# Altium PCB MacroPadPCB.PcbDoc
Units mm, origin at the board's own origin, x right, y up, seen from the top; angles counter-clockwise.
Board outline 95 x 120 mm, 2 copper layers (Top Layer, Bottom Layer); 33 components, 24 nets, 107 pads, 0 vias.
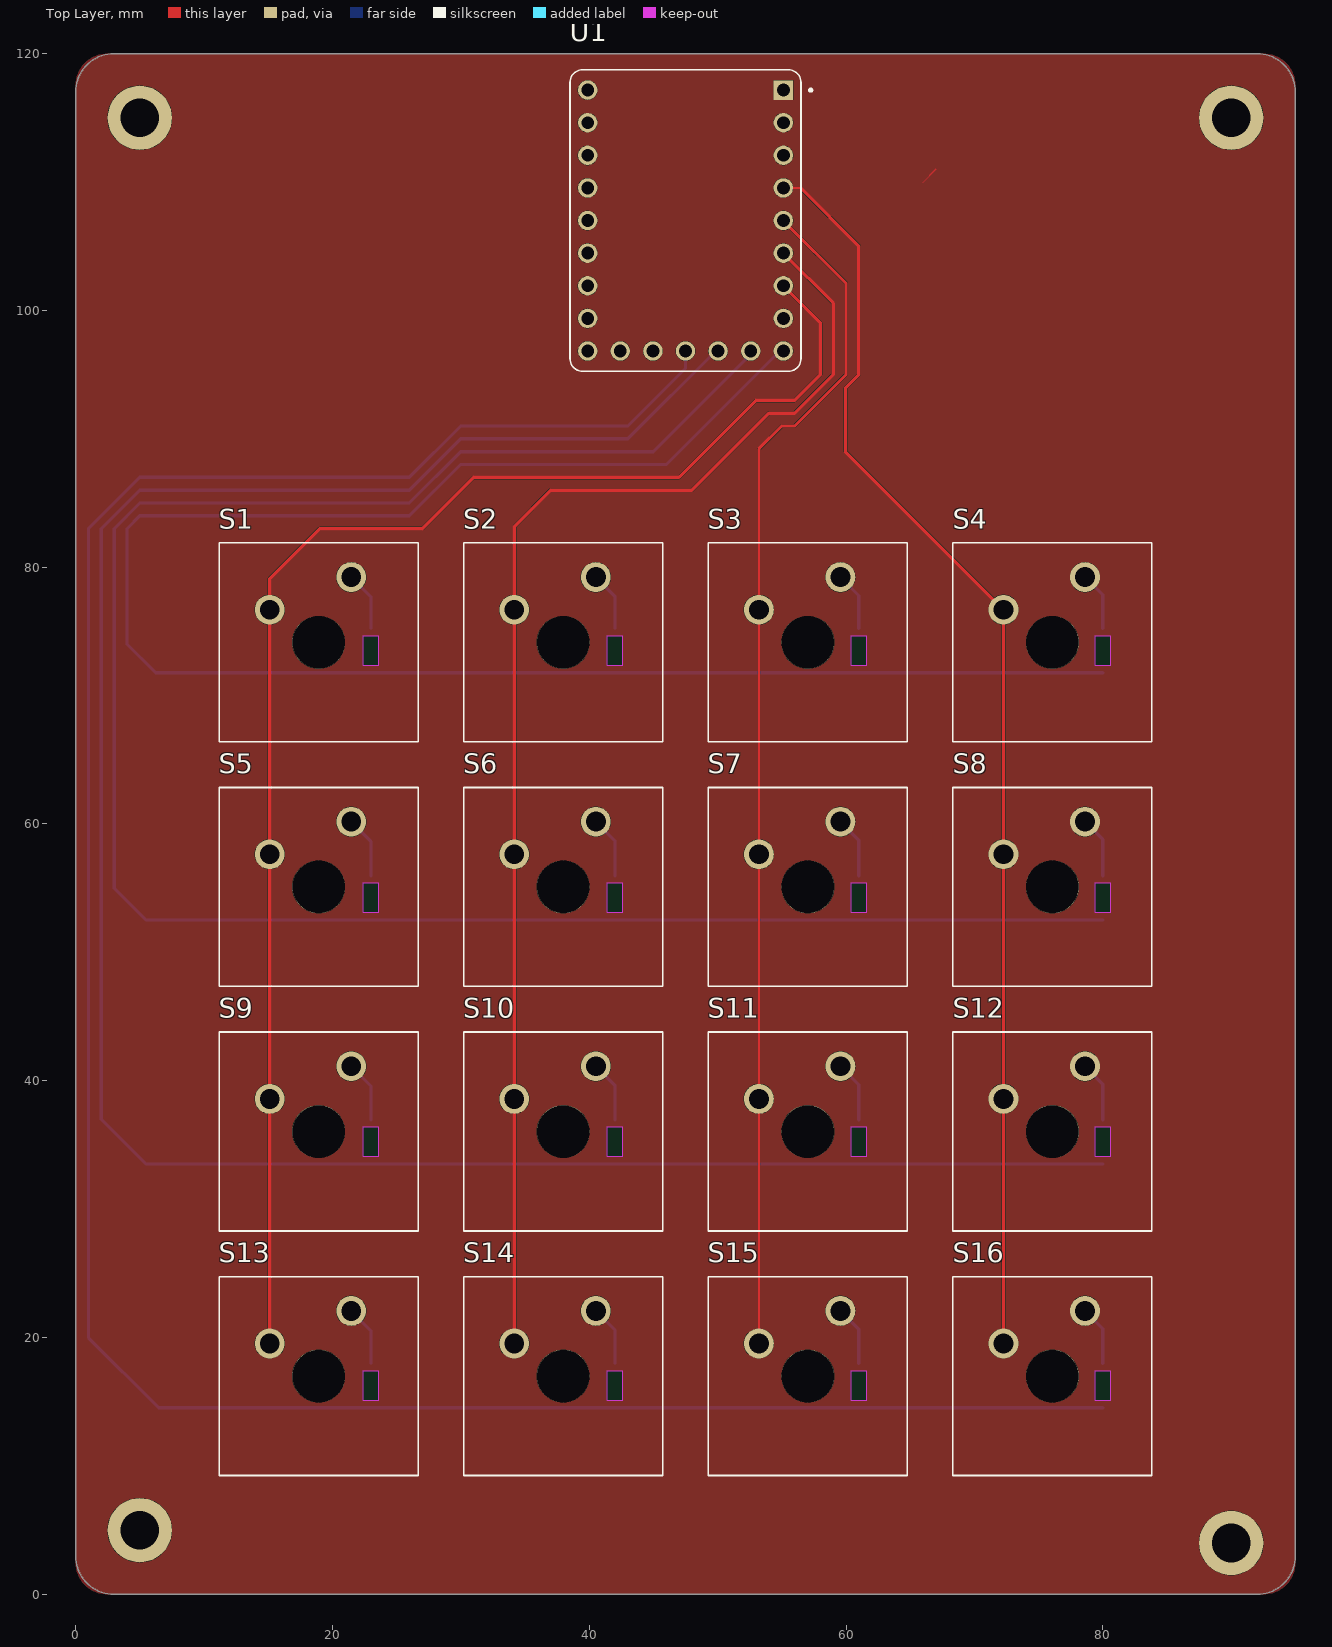
[diagram p0: Top Layer view]
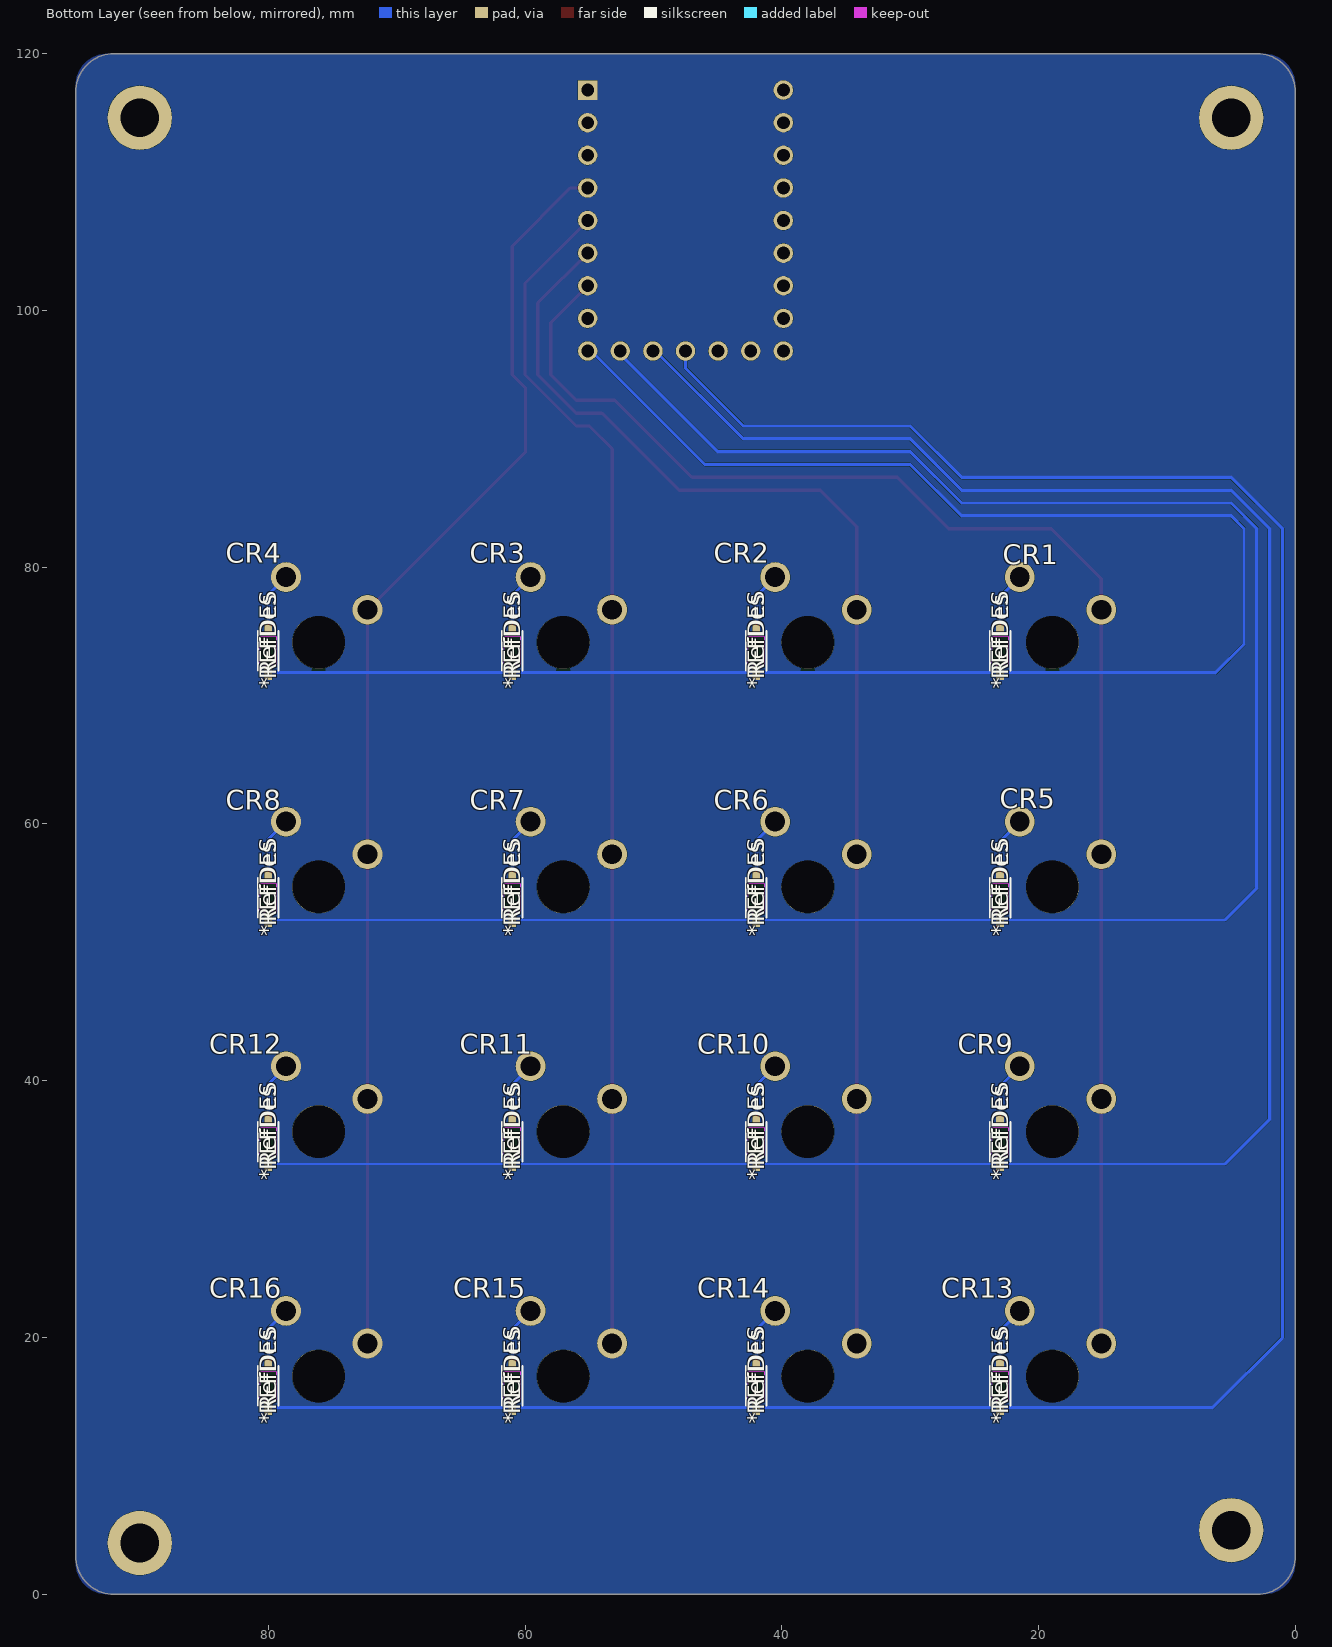
[diagram p1: Bottom Layer view, seen from below]
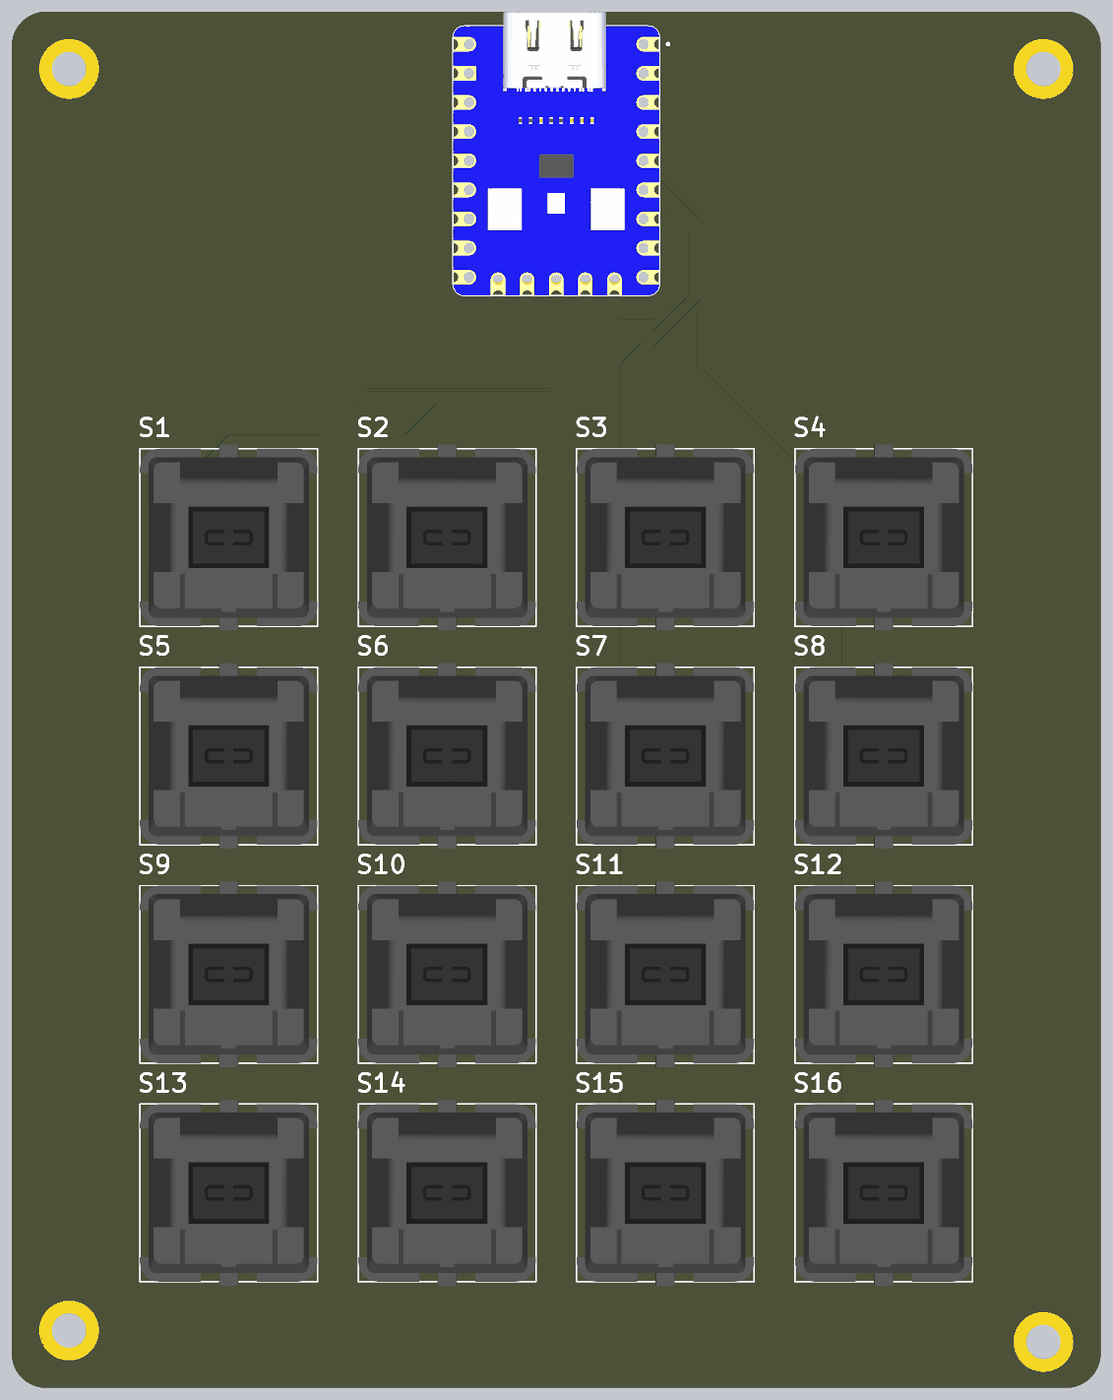
[diagram p2: 3D render of the assembled board from above, using the file's embedded part models]
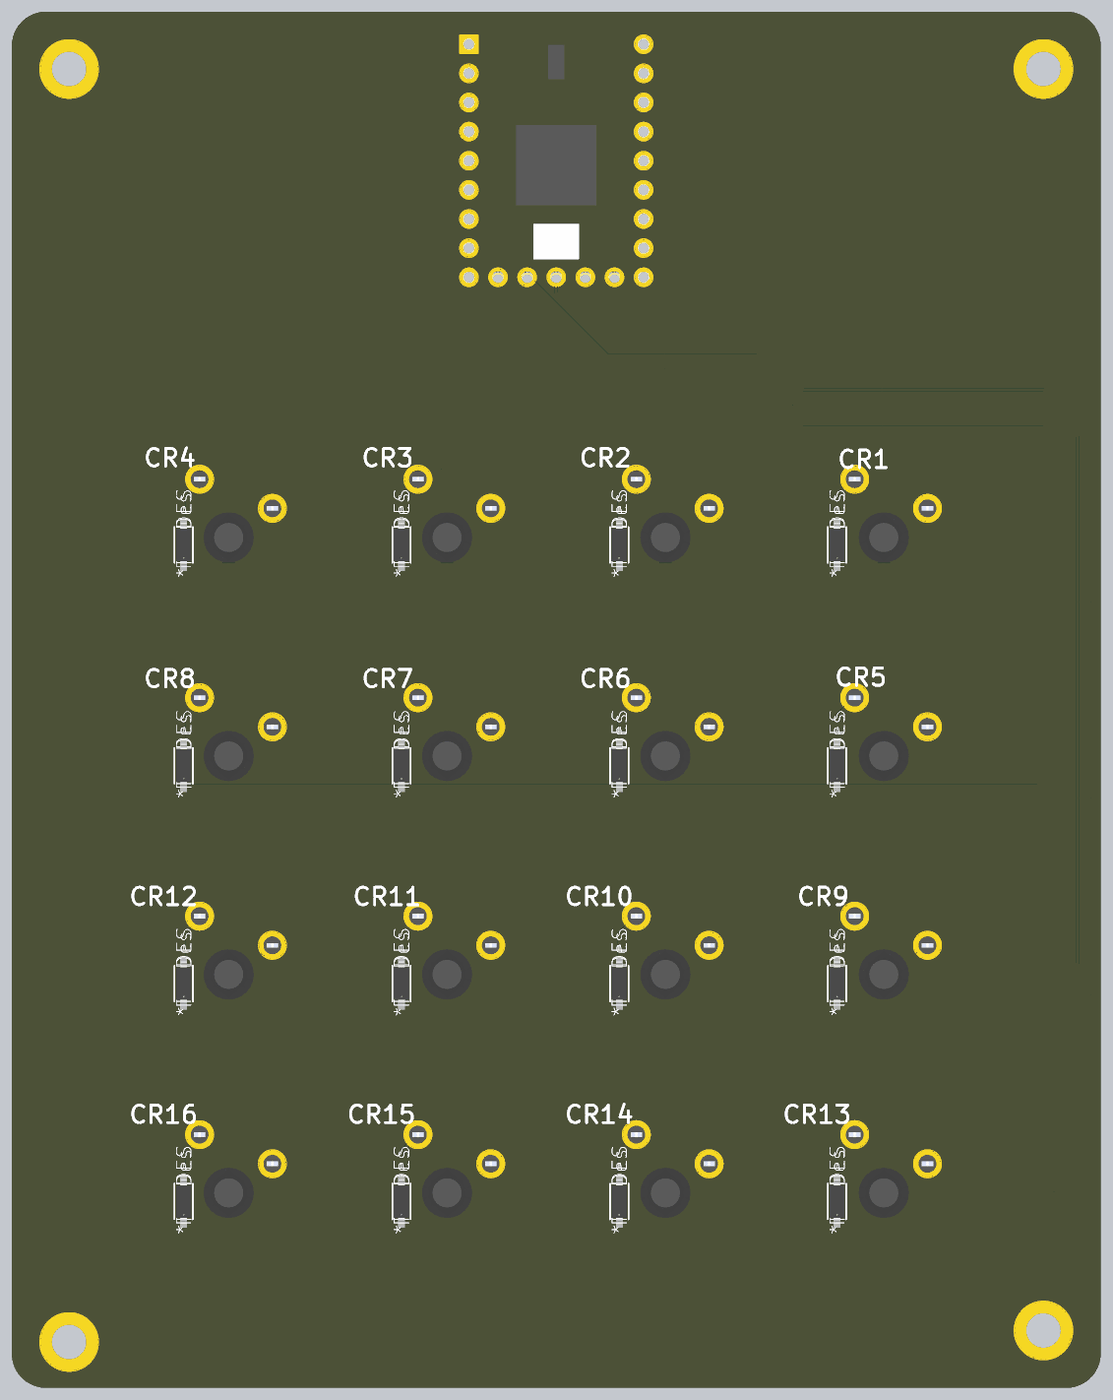
[diagram p3: 3D render of the assembled board from below, using the file's embedded part models]

## Layer stack, top to bottom
Top Solder: solder mask 0.0102, Solder Resist, Dk 3.5
Top Layer: signal copper 0.0356
Dielectric 1: dielectric 0.32, FR-4, Dk 4.8
Bottom Layer: signal copper 0.0356
Bottom Solder: solder mask 0.0102, Solder Resist, Dk 3.5

## Board outline
3,0 cw(c3,3) 0,3 0,117 cw(c3,117) 3,120 92,120 cw(c92,117) 95,117 95,3 cw(c92,3) 92,0

## Design rules (kind name [scope] priority, off if disabled: settings)
Clearance [All] p1 off: gap=0.254 ignorepadtopadclearanceinfootprint=FALSE
HoleSize [All] p1: absolutevalues=TRUE maxlimit=5 minlimit=0.025 maxpercent=80.000 minpercent=20.000
PolygonConnect [All] p1: connectstyle=Relief reliefconductorwidth=0.254 reliefentries=4 polygonreliefangle="90 Angle" airgapwidth=0.254
RoutingVias [All] p1: holewidth=0.711 width=1.27 viastyle="Through Hole" minholewidth=0.711 minwidth=1.27 maxholewidth=0.711 maxwidth=1.27
SolderMaskExpansion [All] p1: expansion=0.102 istentingtop=FALSE
Width [All] p1: maxlimit=0.254 minlimit=0.254 preferedwidth=0.254
29 further rules are at their usual default settings.

## Classes and differential pairs
component class MacropadSchmatic: CR1 CR2 CR3 CR4 CR5 CR6 CR7 CR8 CR9 CR10 CR11 CR12 CR13 CR14 CR15 CR16 S1 S2 S4 S5 S6 S8 S9 S10 S11 S12 S13 S14 S15 S16 U1

## Components (designator, comment, footprint, x,y, rotation, side; value= is the part's Value field where it differs from the comment)
CR1 "1N4148W-13-F" SOD123_DIO 23,73.5 r90 bottom
CR2 "1N4148W-13-F" SOD123_DIO 42,73.5 r90 bottom
CR3 "1N4148W-13-F" SOD123_DIO 61,73.5 r90 bottom
CR4 "1N4148W-13-F" SOD123_DIO 80,73.5 r90 bottom
CR5 "1N4148W-13-F" SOD123_DIO 23,54.25 r90 bottom
CR6 "1N4148W-13-F" SOD123_DIO 42,54.25 r90 bottom
CR7 "1N4148W-13-F" SOD123_DIO 61,54.25 r90 bottom
CR8 "1N4148W-13-F" SOD123_DIO 80,54.25 r90 bottom
CR9 "1N4148W-13-F" SOD123_DIO 23,35.25 r90 bottom
CR10 "1N4148W-13-F" SOD123_DIO 42,35.25 r90 bottom
CR11 "1N4148W-13-F" SOD123_DIO 61,35.25 r90 bottom
CR12 "1N4148W-13-F" SOD123_DIO 80,35.25 r90 bottom
CR13 "1N4148W-13-F" SOD123_DIO 23,16.25 r90 bottom
CR14 "1N4148W-13-F" SOD123_DIO 42,16.25 r90 bottom
CR15 "1N4148W-13-F" SOD123_DIO 61,16.25 r90 bottom
CR16 "1N4148W-13-F" SOD123_DIO 80,16.25 r90 bottom
S1 "MX1A-11NN" SW_MX1A-11NN 18.925,74.15 r0 top
S2 "MX1A-11NN" SW_MX1A-11NN 37.975,74.15 r0 top
S3 "MX1A-11NN" SW_MX1A-11NN 57.025,74.15 r0 top
S4 "MX1A-11NN" SW_MX1A-11NN 76.075,74.15 r0 top
S5 "MX1A-11NN" SW_MX1A-11NN 18.925,55.1 r0 top
S6 "MX1A-11NN" SW_MX1A-11NN 37.975,55.1 r0 top
S7 "MX1A-11NN" SW_MX1A-11NN 57.025,55.1 r0 top
S8 "MX1A-11NN" SW_MX1A-11NN 76.075,55.1 r0 top
S9 "MX1A-11NN" SW_MX1A-11NN 18.925,36.05 r0 top
S10 "MX1A-11NN" SW_MX1A-11NN 37.975,36.05 r0 top
S11 "MX1A-11NN" SW_MX1A-11NN 57.025,36.05 r0 top
S12 "MX1A-11NN" SW_MX1A-11NN 76.075,36.05 r0 top
S13 "MX1A-11NN" SW_MX1A-11NN 18.925,17 r0 top
S14 "MX1A-11NN" SW_MX1A-11NN 37.975,17 r0 top
S15 "MX1A-11NN" SW_MX1A-11NN 57.025,17 r0 top
S16 "MX1A-11NN" SW_MX1A-11NN 76.075,17 r0 top
U1 "RP2040-ZERO" MODULE_RP2040-ZERO 47.5,107 r0 top

## Footprints (in the part's own frame and the unit in brackets; to place one, negate y for a bottom-side part, rotate by r counter-clockwise, add the part's x,y. Pads: shape width x height; smd on the part's side, far side on the other; paste and mask are expansions set on the pad)
MODULE_RP2040-ZERO [mm]
  rect 1.508x1.508 / inner round 1.508 / far side rect 1.508x1.508 hole 1: 1(7.62,10.16)
  round 1.508 hole 1: 2(7.62,7.62) 3(7.62,5.08) 4(7.62,2.54) 5(7.62,0) 6(7.62,-2.54) 7(7.62,-5.08) 8(7.62,-7.62) 9(7.62,-10.16) 10(5.08,-10.16) 11(2.54,-10.16) 12(0,-10.16) 13(-2.54,-10.16) 14(-5.08,-10.16) 15(-7.62,-10.16) 16(-7.62,-7.62) 17(-7.62,-5.08) 18(-7.62,-2.54) 19(-7.62,0) 20(-7.62,2.54) 21(-7.62,5.08) 22(-7.62,7.62) 23(-7.62,10.16)
  silkscreen extent -9,-11.75 9.85,11.75, body extent -9,-11.75 9,12.95, height 4.35
SOD123_DIO [mm]
  rect 1.111x0.601 smd paste+0 mask+0: 1(-1.725,0) 2(1.725,0)
  Keep-Out Layer region: -1.119,-0.624 -1.119,0.624 1.119,0.624 1.119,-0.624
  silkscreen extent -1.55,-0.8 1.55,0.8, body extent -1.92,-0.67 1.92,0.67, height 0.81
SW_MX1A-11NN [mil]
  round 91.5 hole 61: 1(-150,100) 2(100,200)
  round 161 hole 161 unplated: ""(0,0)
  silkscreen extent -305,-305 305,305, body extent -305,-319 305,319, height 600

## Part data
CR1 CR2 CR3 CR4 CR5 CR6 CR7 CR8 CR9 CR10 CR11 CR12 CR13 CR14 CR15 CR16: library part CMP-446-000000-1, "Description", Manufacturer_Name="Diodes Inc", Copyright="Copyright (C) 2025 Ultra Librarian. All rights reserved.", Design Item ID=1N4148W-13-F, Manufacturer_Part_Number=1N4148W-13-F, Source=1N4148W-13-F.SchLib
S1 S2 S3 S4 S5 S6 S7 S8 S9 S10 S11 S12 S13 S14 S15 S16: library part CMP-011-00017-1, "Switch,Key,SPST-NO,Keyboard,Low Profile,10mA,12VDC,Face Place Mount,Std Force", Case/Package=None, Check_prices=https://www.snapeda.com/parts/MX1A-11NN/Cherry/view-part/?ref=eda, Component Type=Standard, Design Item ID=MX1A-11NN, MF=Cherry, MP=MX1A-11NN, Pins=2, SnapEDA_Link=https://www.snapeda.com/parts/MX1A-11NN/Cherry/view-part/?ref=snap, Source=MX1A-11NN.SchLib
U1: library part CMP-438-000000-1, "Low-Cost, High-Performance Pico-Like MCU Board Based On Raspberry Pi Microcontroller RP2040", Package=Package, Check_prices=https://www.snapeda.com/parts/RP2040-ZERO/Waveshare+Electronics/view-part/?ref=eda, Component Type=Standard, Design Item ID=RP2040-ZERO, MF="Waveshare Electronics", MP=RP2040-ZERO, Pin Count=23, SnapEDA_Link=https://www.snapeda.com/parts/RP2040-ZERO/Waveshare+Electronics/view-part/?ref=snap, Source=RP2040-ZERO.SchLib

## Free pads (board coordinates)
  round 5 hole 3: 1(5,115) 2(90,115) 3(5,5) 4(90,4)

## Nets (pads, with @x,y where several pads share a name; then routed paths per layer and width w, separated by ;. In a path a pad name is that pad's centre, name@x,y a point inside that pad or via, vN(x,y) a via of type N, cw(c..) or ccw(c..) an arc to the next point about the centre after c; other vN are vias at no path point)
COL0: S1.1 S5.1 S9.1 S13.1 U1.7 | length 117.2
  Top Layer w0.254: S13.1 S9.1 S5.1 S1.1 15.115,79.115 19,83 27,83 31,87 47,87 53,93 56,93 58,95 58,99.04 U1.7
COL1: S2.1 S6.1 S10.1 S14.1 U1.6 | length 104.4
  Top Layer w0.254: S14.1 S10.1 S6.1 S2.1 34.165,83.165 37,86 48,86 54,92 56,92 59,95 59,100.58 U1.6
COL2: S3.1 S7.1 S11.1 S15.1 U1.5 | length 92.9
  Top Layer w0.254: S15.1 S11.1 S7.1 S3.1 53.215,89.215 55,91 56,91 60,95 60,102.12 U1.5
COL3: S4.1 S8.1 S12.1 S16.1 U1.4 | length 98.8
  Top Layer w0.254: U1.4 56.46,109.54 61,105 61,95 59.955,93.955 59.955,89 S4.1 S16.1
NetCR1_2: CR1.2 S1.2 | length 4.6
  Bottom Layer w0.254: S1.2 23,77.695 CR1.2
NetCR2_2: CR2.2 S2.2 | length 4.6
  Bottom Layer w0.254: S2.2 42,77.745 CR2.2
NetCR3_2: CR3.2 S3.2 | length 4.6
  Bottom Layer w0.254: S3.2 61,77.795 CR3.2
NetCR4_2: CR4.2 S4.2 | length 4.6
  Bottom Layer w0.254: S4.2 80,77.845 CR4.2
NetCR5_2: CR5.2 S5.2 | length 4.8
  Bottom Layer w0.254: S5.2 23,58.645 CR5.2
NetCR6_2: CR6.2 S6.2 | length 4.8
  Bottom Layer w0.254: S6.2 42,58.695 CR6.2
NetCR7_2: CR7.2 S7.2 | length 4.8
  Bottom Layer w0.254: S7.2 61,58.745 CR7.2
NetCR8_2: CR8.2 S8.2 | length 4.8
  Bottom Layer w0.254: S8.2 80,58.795 CR8.2
NetCR9_2: CR9.2 S9.2 | length 4.8
  Bottom Layer w0.254: S9.2 23,39.595 CR9.2
NetCR10_2: CR10.2 S10.2 | length 4.8
  Bottom Layer w0.254: S10.2 42,39.645 CR10.2
NetCR11_2: CR11.2 S11.2 | length 4.7
  Bottom Layer w0.254: S11.2 61,39.695 CR11.2
NetCR12_2: CR12.2 S12.2 | length 4.7
  Bottom Layer w0.254: S12.2 80,39.745 CR12.2
NetCR13_2: CR13.2 S13.2 | length 4.7
  Bottom Layer w0.254: S13.2 23,20.545 CR13.2
NetCR14_2: CR14.2 S14.2 | length 4.7
  Bottom Layer w0.254: S14.2 42,20.595 CR14.2
NetCR15_2: CR15.2 S15.2 | length 4.7
  Bottom Layer w0.254: S15.2 61,20.645 CR15.2
NetCR16_2: CR16.2 S16.2 | length 4.7
  Bottom Layer w0.254: S16.2 80,20.695 CR16.2
ROW0: CR1.1 CR2.1 CR3.1 CR4.1 U1.9 | length 142.8
  Bottom Layer w0.254: U1.9 54.84,96.84 46,88 30,88 26,84 5,84 4,83 4,74 6.225,71.775 CR1.1 CR2.1 CR3.1 CR4.1
ROW1: CR5.1 CR6.1 CR7.1 CR8.1 U1.10 | length 161.5
  Bottom Layer w0.254: U1.10 52.58,96.58 45,89 30,89 26,85 5,85 3,83 3,55 5.475,52.525 CR5.1 CR6.1 CR7.1 CR8.1
ROW2: CR9.1 CR10.1 CR11.1 CR12.1 U1.11 | length 179.2
  Bottom Layer w0.254: U1.11 49.84,96.84 43,90 30,90 26,86 5,86 2,83 2,37 5.475,33.525 CR9.1 CR10.1 CR11.1 CR12.1
ROW3: CR13.1 CR14.1 CR15.1 CR16.1 U1.12 | length 197.3
  Bottom Layer w0.254: U1.12 47.5,95.5 43,91 30,91 26,87 5,87 1,83 1,20 6.475,14.525 CR13.1 CR14.1 CR15.1 CR16.1
pads on no net: S1. S2. S3. S4. S5. S6. S7. S8. S9. S10. S11. S12. S13. S14. S15. S16. U1.1 U1.2 U1.3 U1.8 U1.13 U1.14 U1.15 U1.16 U1.17 U1.18 U1.19 U1.20 U1.21 U1.22 U1.23

## Polygon pours and split planes (outlines as drawn)
no net on Top Layer "NONET_L-01_P-001" (solid, pour order 4): 95,117.46 ccw(c92.46,117.46) 92.46,120 2.54,120 ccw(c2.54,117.46) 0,117.46 0,2.54 ccw(c2.54,2.54) 2.54,0 92.46,0 ccw(c92.46,2.54) 95,2.54 95,3
no net on Top Layer "NONET_L-01_P-001" (solid, pour order 3): 66,110 67,111
no net on Bottom Layer "NONET_L-01_P-001" (solid, pour order 7): 2.54,120 ccw(c2.54,117.46) 0,117.46 0,2.54 ccw(c2.54,2.54) 2.54,0 92.46,0 ccw(c92.46,2.54) 95,2.54 95,117.46 ccw(c92.46,117.46) 92.46,120 92,120

## Silkscreen, mask and mechanical layers (free items; w line width, h text height)
Mechanical 1:
  lines w0.254: 0,116.968 0,117 ; 0,117 cw(c3,117) 3,120 92,120 cw(c92,117) 95,117 95,3 cw(c92,3) 92,0 3,0 cw(c3,3) 0,3 0,117

## Text inside footprints (layer, text, board x,y; h text height)
CR1: Mechanical 13 "RefDes2" at 22.365,71.278 h1.27 r270; Mechanical 13 "*" at 22.365,72.012 h1.27 r270; Bottom Overlay "RefDes" at 22.365,71.595 h1.27 r270; Bottom Overlay "*" at 22.365,70.521 h1.27 r270; Bottom Overlay "REFDES" at 22.365,71.278 h1.27 r270
CR2: Mechanical 13 "*" at 41.365,72.012 h1.27 r270; Mechanical 13 "RefDes2" at 41.365,71.278 h1.27 r270; Bottom Overlay "REFDES" at 41.365,71.278 h1.27 r270; Bottom Overlay "*" at 41.365,70.521 h1.27 r270; Bottom Overlay "RefDes" at 41.365,71.595 h1.27 r270
CR3: Mechanical 13 "*" at 60.365,72.012 h1.27 r270; Mechanical 13 "RefDes2" at 60.365,71.278 h1.27 r270; Bottom Overlay "REFDES" at 60.365,71.278 h1.27 r270; Bottom Overlay "*" at 60.365,70.521 h1.27 r270; Bottom Overlay "RefDes" at 60.365,71.595 h1.27 r270
CR4: Mechanical 13 "RefDes2" at 79.365,71.278 h1.27 r270; Mechanical 13 "*" at 79.365,72.012 h1.27 r270; Bottom Overlay "RefDes" at 79.365,71.595 h1.27 r270; Bottom Overlay "*" at 79.365,70.521 h1.27 r270; Bottom Overlay "REFDES" at 79.365,71.278 h1.27 r270
CR5: Mechanical 13 "*" at 22.365,52.762 h1.27 r270; Mechanical 13 "RefDes2" at 22.365,52.028 h1.27 r270; Bottom Overlay "REFDES" at 22.365,52.028 h1.27 r270; Bottom Overlay "*" at 22.365,51.271 h1.27 r270; Bottom Overlay "RefDes" at 22.365,52.345 h1.27 r270
CR6: Mechanical 13 "*" at 41.365,52.762 h1.27 r270; Mechanical 13 "RefDes2" at 41.365,52.028 h1.27 r270; Bottom Overlay "REFDES" at 41.365,52.028 h1.27 r270; Bottom Overlay "*" at 41.365,51.271 h1.27 r270; Bottom Overlay "RefDes" at 41.365,52.345 h1.27 r270
CR7: Mechanical 13 "RefDes2" at 60.365,52.028 h1.27 r270; Mechanical 13 "*" at 60.365,52.762 h1.27 r270; Bottom Overlay "RefDes" at 60.365,52.345 h1.27 r270; Bottom Overlay "*" at 60.365,51.271 h1.27 r270; Bottom Overlay "REFDES" at 60.365,52.028 h1.27 r270
CR8: Mechanical 13 "RefDes2" at 79.365,52.028 h1.27 r270; Mechanical 13 "*" at 79.365,52.762 h1.27 r270; Bottom Overlay "RefDes" at 79.365,52.345 h1.27 r270; Bottom Overlay "*" at 79.365,51.271 h1.27 r270; Bottom Overlay "REFDES" at 79.365,52.028 h1.27 r270
CR9: Mechanical 13 "RefDes2" at 22.365,33.028 h1.27 r270; Mechanical 13 "*" at 22.365,33.762 h1.27 r270; Bottom Overlay "RefDes" at 22.365,33.345 h1.27 r270; Bottom Overlay "*" at 22.365,32.271 h1.27 r270; Bottom Overlay "REFDES" at 22.365,33.028 h1.27 r270
CR10: Mechanical 13 "RefDes2" at 41.365,33.028 h1.27 r270; Mechanical 13 "*" at 41.365,33.762 h1.27 r270; Bottom Overlay "RefDes" at 41.365,33.345 h1.27 r270; Bottom Overlay "*" at 41.365,32.271 h1.27 r270; Bottom Overlay "REFDES" at 41.365,33.028 h1.27 r270
CR11: Mechanical 13 "*" at 60.365,33.762 h1.27 r270; Mechanical 13 "RefDes2" at 60.365,33.028 h1.27 r270; Bottom Overlay "REFDES" at 60.365,33.028 h1.27 r270; Bottom Overlay "*" at 60.365,32.271 h1.27 r270; Bottom Overlay "RefDes" at 60.365,33.345 h1.27 r270
CR12: Mechanical 13 "*" at 79.365,33.762 h1.27 r270; Mechanical 13 "RefDes2" at 79.365,33.028 h1.27 r270; Bottom Overlay "REFDES" at 79.365,33.028 h1.27 r270; Bottom Overlay "*" at 79.365,32.271 h1.27 r270; Bottom Overlay "RefDes" at 79.365,33.345 h1.27 r270
CR13: Mechanical 13 "*" at 22.365,14.762 h1.27 r270; Mechanical 13 "RefDes2" at 22.365,14.028 h1.27 r270; Bottom Overlay "REFDES" at 22.365,14.028 h1.27 r270; Bottom Overlay "*" at 22.365,13.271 h1.27 r270; Bottom Overlay "RefDes" at 22.365,14.345 h1.27 r270
CR14: Mechanical 13 "*" at 41.365,14.762 h1.27 r270; Mechanical 13 "RefDes2" at 41.365,14.028 h1.27 r270; Bottom Overlay "REFDES" at 41.365,14.028 h1.27 r270; Bottom Overlay "*" at 41.365,13.271 h1.27 r270; Bottom Overlay "RefDes" at 41.365,14.345 h1.27 r270
CR15: Mechanical 13 "*" at 60.365,14.762 h1.27 r270; Mechanical 13 "RefDes2" at 60.365,14.028 h1.27 r270; Bottom Overlay "REFDES" at 60.365,14.028 h1.27 r270; Bottom Overlay "*" at 60.365,13.271 h1.27 r270; Bottom Overlay "RefDes" at 60.365,14.345 h1.27 r270
CR16: Mechanical 13 "*" at 79.365,14.762 h1.27 r270; Mechanical 13 "RefDes2" at 79.365,14.028 h1.27 r270; Bottom Overlay "REFDES" at 79.365,14.028 h1.27 r270; Bottom Overlay "*" at 79.365,13.271 h1.27 r270; Bottom Overlay "RefDes" at 79.365,14.345 h1.27 r270